# Altium PCB DC_Motor_Breakout.PcbDoc
Units mil, origin at the board's own origin, x right, y up, seen from the top; angles counter-clockwise.
Board outline 1440.01 x 1500 mil, 2 copper layers (Top Layer, Bottom Layer), stack 59.8 mil thick; 3 components, 2 nets, 19 pads, 204 vias.
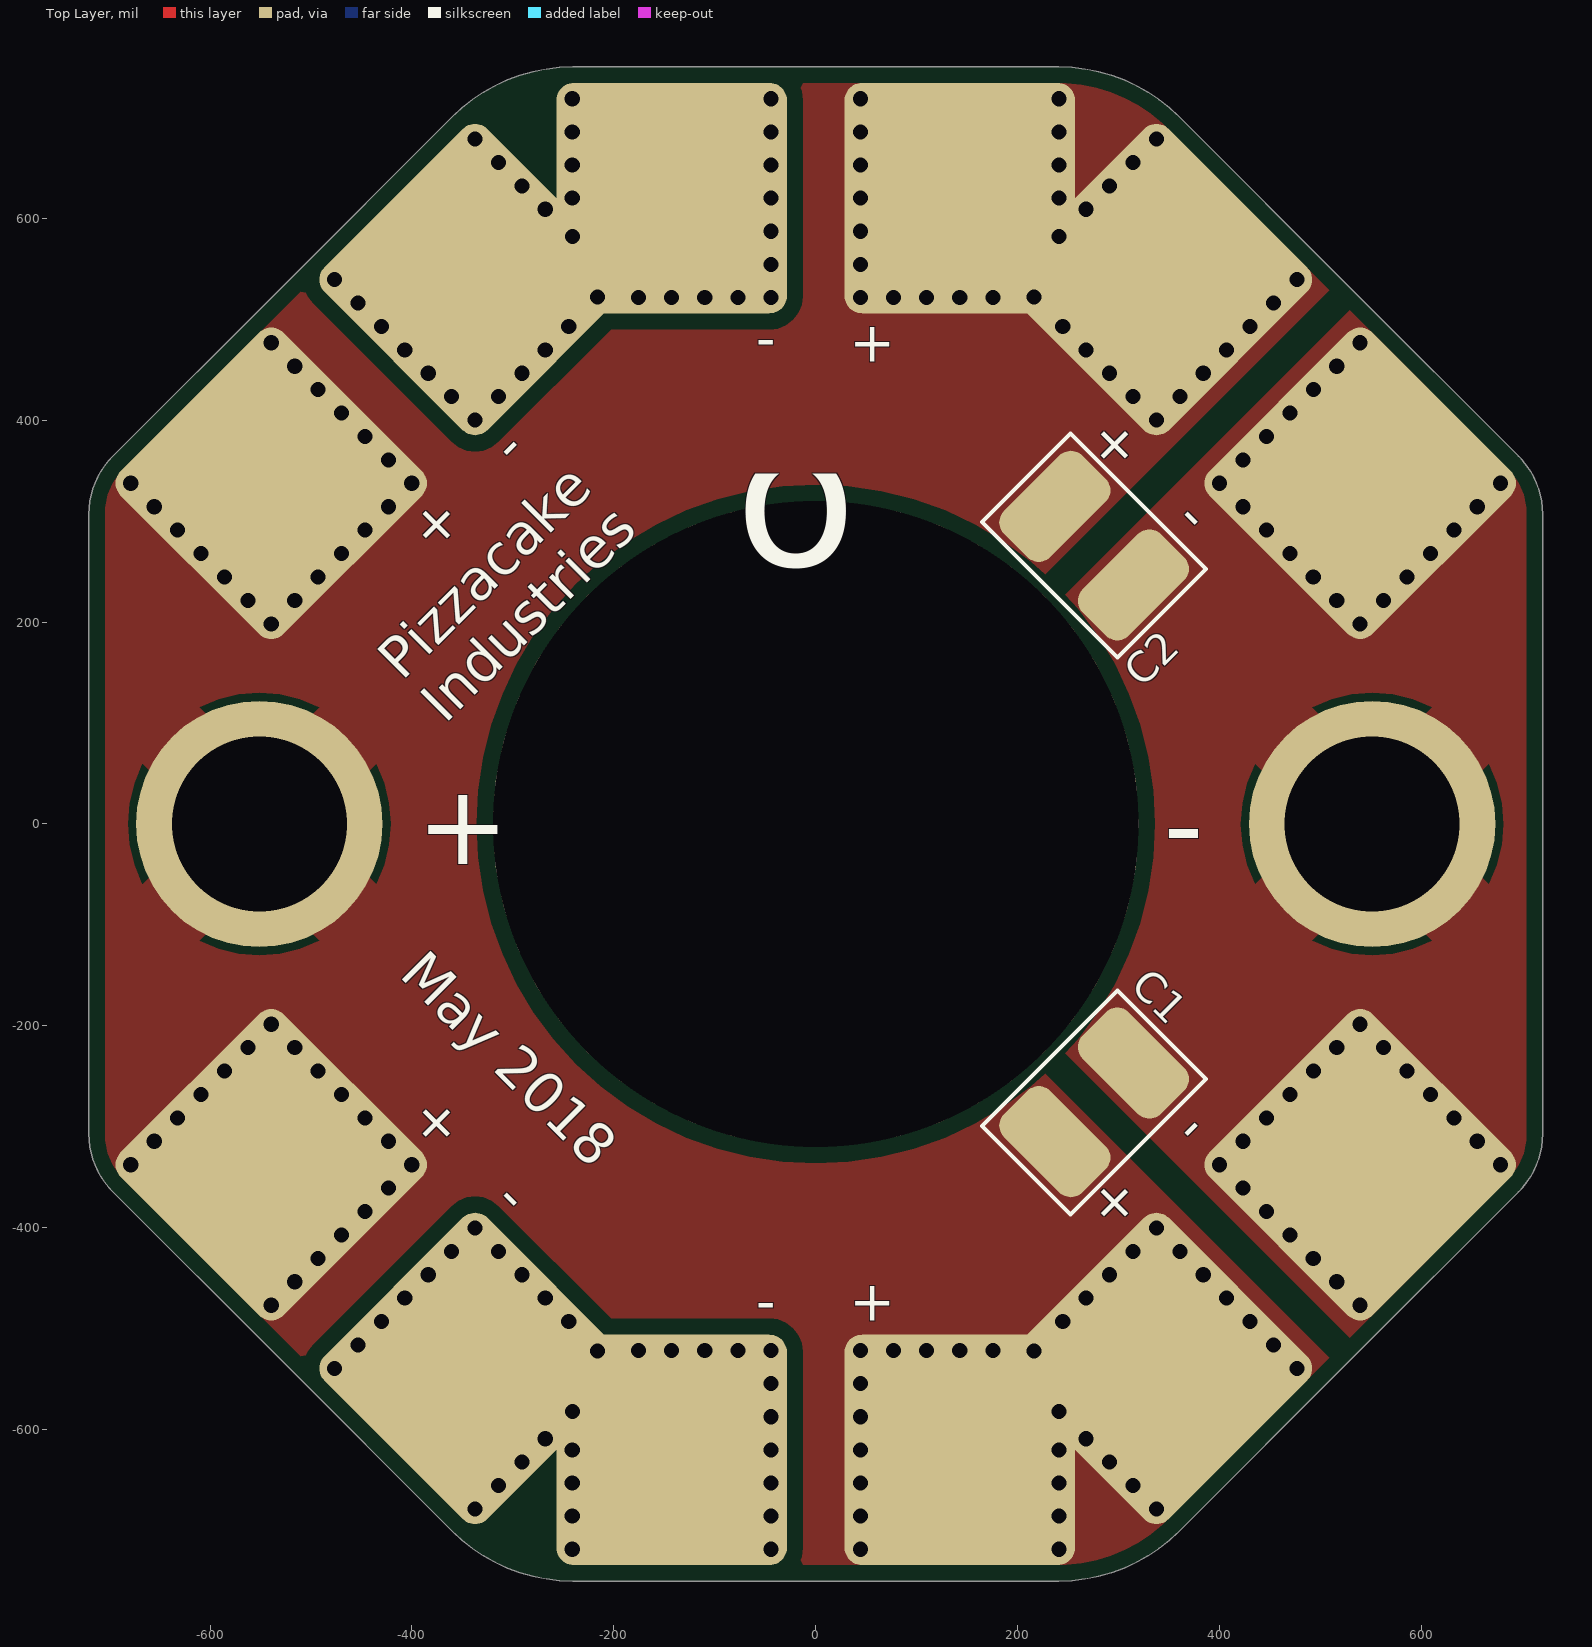
[diagram p0: Top Layer view]
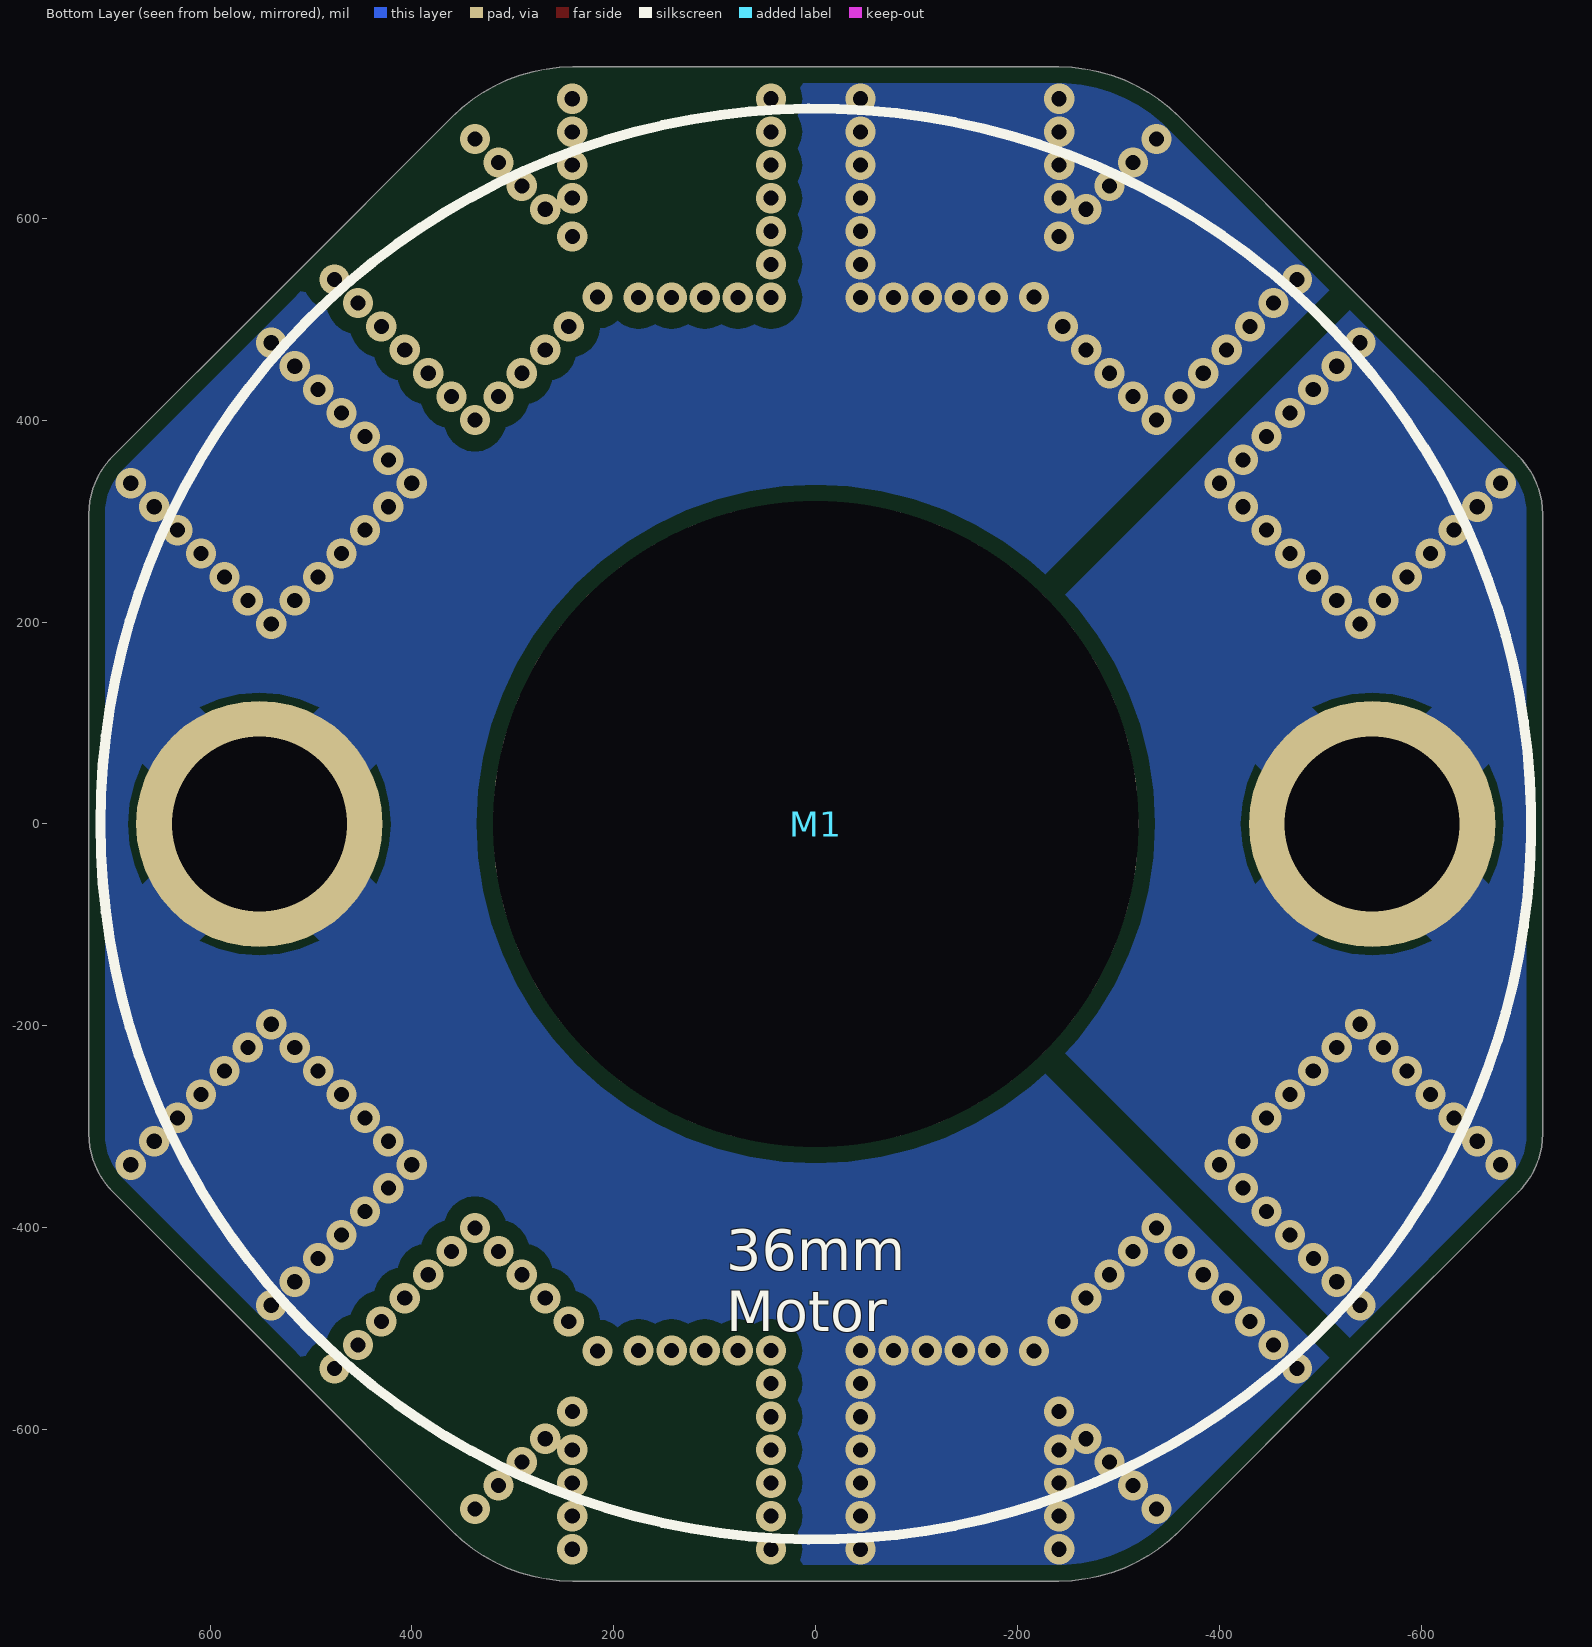
[diagram p1: Bottom Layer view, seen from below]

## Layer stack, top to bottom
Top Solder: solder mask 0.4, Solder Resist, Dk 3.5
Top Layer: signal copper 1.4
Dielectric 1: dielectric 57, FR-4, Dk 4.8
Bottom Layer: signal copper 1.4
Bottom Solder: solder mask 0.4, Solder Resist, Dk 3.5

## Board outline
-696.19,-364.47 -530.33,-530.33 -360.23,-700.43 ccw(c-240.56,-580.77) -240.56,-750 240.56,-750 ccw(c240.56,-580.77) 360.23,-700.43 360.22,-700.43 530.33,-530.32 696.18,-364.48 ccw(c638.67,-306.97) 720,-306.97 720,306.96 ccw(c638.67,306.96) 696.18,364.47 696.19,364.47 530.33,530.33 360.23,700.43 ccw(c240.56,580.77) 240.56,750 -240.56,750 ccw(c-240.56,580.77) -360.23,700.43 -360.22,700.43 -530.33,530.32 -696.18,364.47 ccw(c-638.67,306.96) -720,306.96 -720,-306.96 ccw(c-638.67,-306.96)

## Design rules (kind name [scope] priority, off if disabled: settings)
BoardOutlineClearance [All] p1: gap=0 ignorepadtopadclearanceinfootprint=FALSE except(16: Poly-OutlineEdge)
Clearance Clearance_HV [InNetClass('HV') vs NOT ((OnLayer('Top Overlay') OR OnLayer('Bottom Overlay')))] p1: gap=50 ignorepadtopadclearanceinfootprint=FALSE except(0: Arc-Hole Track-Hole SMDPad-Hole THPad-Hole Via-Hole Fill-Hole Poly-Hole Region-Hole Text-Hole; 40: THPad-THPad)
Clearance Clearance_MV [InNetClass('MV') vs NOT ((OnLayer('Top Overlay') OR OnLayer('Bottom Overlay')))] p2: gap=20 ignorepadtopadclearanceinfootprint=FALSE except(0: Arc-Hole Track-Hole SMDPad-Hole THPad-Hole Via-Hole Fill-Hole Poly-Hole Region-Hole Text-Hole)
Clearance "Polygon Clearance" [InPoly] p3: gap=16 ignorepadtopadclearanceinfootprint=FALSE except(0: Arc-Hole Track-Hole SMDPad-Hole THPad-Hole Via-Hole Fill-Hole Poly-Hole Region-Hole Text-Hole)
Clearance [NOT ((OnLayer('Top Overlay') OR OnLayer('Bottom Overlay')))] p4: gap=7.5 ignorepadtopadclearanceinfootprint=FALSE except(0: Arc-Hole Track-Hole SMDPad-Hole THPad-Hole Via-Hole Fill-Hole Poly-Hole Region-Hole Text-Hole)
ComponentClearance ComponentClearance_Connectors [Name Like 'J*' vs Name Like 'J*'] p1: gap=0 collisioncheckmode=3 verticalgap=0 showdistances=FALSE
ComponentClearance [All] p2: gap=10 collisioncheckmode=3 verticalgap=0 showdistances=FALSE
DiffPairsRouting [All] p1: maxlimit=12 minlimit=7.5 mostfreqgap=7.5 toplayer_minwidth=6 toplayer_maxwidth=12 toplayer_prefwidth=10 bottomlayer_minwidth=6 bottomlayer_maxwidth=12 bottomlayer_prefwidth=10 maxuncoupledlength=500
Height [All] p1: minheight=0 maxheight=39370.08 prefheight=500
HoleSize [All] p1: absolutevalues=TRUE maxlimit=250 minlimit=15 maxpercent=80.000 minpercent=20.000
MinimumSolderMaskSliver [All] p1 off: minsoldermaskwidth=4
PlaneClearance PlaneClearance_HV [InNetClass('HV')] p1: clearance=50
PlaneClearance PlaneClearance_MV [InNetClass('MV')] p2: clearance=30
PlaneClearance [All] p3: clearance=20
PlaneConnect [All] p1: planeconnectstyle=Relief reliefexpansion=10 reliefentries=4 reliefconductorwidth=12 reliefairgap=6
PolygonConnect [All] p1: thpad.connectstyle=Relief thpad.reliefconductorwidth=80 thpad.reliefentries=4 thpad.polygonreliefangle="45 Angle" thpad.airgapwidth=7.5 smdpad.connectstyle=Direct smdpad.reliefconductorwidth=12 smdpad.reliefentries=4 smdpad.polygonreliefangle="90 Angle" smdpad.airgapwidth=7.5 via.connectstyle=Direct via.reliefconductorwidth=12 via.reliefentries=4 via.polygonreliefangle="90 Angle" via.airgapwidth=7.5
RoutingVias [All] p1: holewidth=15 width=30 viastyle="Through Hole" minholewidth=15 minwidth=20 maxholewidth=250 maxwidth=500
SMDNeckDown [All] p1: percent=100.000
SilkToSilkClearance [All] p1 off: silktosilkclearance=10
SilkToSolderMaskClearance [IsPad] p1: minsilkscreentomaskgap=6 clearancetoexposedcopper=TRUE
SolderMaskExpansion [All] p1: expansion=4
ViasUnderSMD [All] p1: allowed=FALSE
Width [All] p1: maxlimit=1000 minlimit=6 preferedwidth=10 minimp=50.000000 maximp=50.000000 favimp=50.000000 checkconnectedcopper=TRUE
21 further rules are at their usual default settings.

## Components (designator, comment, footprint, x,y, rotation, side; value= is the part's Value field where it differs from the comment)
C1 "C_1210_10uF" 1210_Capacitor 275.77,-275.77 r225 top value=10uF
C2 "C_1210_10uF" 1210_Capacitor 275.77,275.77 r135 top value=10uF
M1 "DC Motor" Motor_DC_36mm 0,0 r0 bottom locked

## Footprints (in the part's own frame and the unit in brackets; to place one, negate y for a bottom-side part, rotate by r counter-clockwise, add the part's x,y. Pads: shape width x height; smd on the part's side, far side on the other; paste and mask are expansions set on the pad)
1210_Capacitor [mil] "1210 Capacitor"
  rrect50% 65x110 smd: 1(-55,0) 2(55,0)
  silkscreen extent -95,-62 95,62, body extent -84,-54 82,52, height 36
Motor_DC_36mm [mm] "36 mm diameter brushed DC gear motor"
  round 6.2 hole 4.4: 1(-14,0) 2(14,0)
  round 16.25 hole 16.25 unplated: ""(0,0)
  silkscreen extent -18,-18 18,18, body extent -26.15,-26.15 26.15,26.15, height 98.01

## Part data
C1 C2: "CAP CER 10UF 50V 10% X5R 1210", Manufacturer="Taiyo Yuden", Manufacturer PN=UMK325BJ106KM-T, Package=1210, Supplier Part Number 1=587-2247-1-ND, Supplier 1=Digi-Key, SVP Creator="Matt Rogge"
M1: library part M_DC_Motor, "36mm DC Motor"

## Free pads (board coordinates)
  rrect15% 228.35x228.35 smd rot 135: 1(-539.33,-337.5) 1(539.33,337.49) 2(-337.49,-539.32) 2(337.49,539.32)
  rrect15% 228.35x228.35 smd rot 45: 1(-337.5,539.32) 1(337.5,-539.33) 2(-539.32,337.48) 2(539.32,-337.49)
  rrect15% 228.35x228.35 smd: 1(-142.72,-620.01) 1(142.72,620.01) 2(-142.72,619.99) 2(142.72,-620)

## Via types
v1: diameter 30, hole 15, Top Layer to Bottom Layer, tented bottom, 204 vias

## Nets (pads, with @x,y where several pads share a name; then routed paths per layer and width w, separated by ;. In a path a pad name is that pad's centre, name@x,y a point inside that pad or via, vN(x,y) a via of type N, cw(c..) or ccw(c..) an arc to the next point about the centre after c; other vN are vias at no path point)
MOTOR+: C1.2 C2.2 M1.1 pad.1@142.72,620.01 pad.1@337.5,-539.33 pad.1@-539.33,-337.5 pad.2@142.72,-620 pad.2@337.49,539.32 pad.2@-539.32,337.48
  other v1: 44.29,-718.43 241.14,-718.43 44.28,-685.63 241.15,-685.63 337.49,-678.52 314.29,-655.34 44.28,-652.82 241.15,-652.82 291.09,-632.14 44.29,-620.01 241.14,-620.01 267.9,-608.93 44.28,-587.2 241.09,-582.04 44.28,-554.4 476.68,-539.32 44.29,-521.59 77.1,-521.6 109.91,-521.6 142.72,-521.59 175.52,-521.6 216.22,-521.99 453.49,-516.14 244.69,-492.92 430.29,-492.94 -539.32,-476.68 267.9,-469.73 407.1,-469.73 -516.14,-453.49 291.09,-446.53 383.89,-446.54 -492.94,-430.29 314.29,-423.33 360.69,-423.34 -469.73,-407.1 337.5,-400.14 -446.54,-383.89 -423.34,-360.69 -678.52,-337.49 -400.14,-337.5 -655.34,-314.29 -423.33,-314.29 -632.14,-291.09 -446.53,-291.09 -608.93,-267.9 -469.73,-267.9 -585.74,-244.69 -492.92,-244.69 -562.54,-221.5 -516.12,-221.5 -539.33,-198.31 -539.33,198.3 -562.54,221.49 -516.14,221.51 -585.74,244.69 -492.94,244.71 -608.93,267.9 -469.73,267.9 -632.14,291.09 -446.54,291.1 -655.34,314.28 -423.34,314.3 -678.52,337.48 -400.14,337.49 -423.33,360.7 -446.53,383.9 337.5,400.13 -469.73,407.09 314.31,423.34 360.71,423.32 -492.92,430.3 291.11,446.54 383.91,446.52 -516.12,453.5 267.9,469.73 407.1,469.73 -539.32,476.68 244.71,492.94 430.3,492.92 453.5,516.12 44.29,521.58 77.1,521.57 109.91,521.57 142.72,521.58 175.52,521.57 216.22,521.99 476.68,539.32 44.3,554.39 241.09,582.04 44.3,587.2 267.9,608.92 44.29,620.01 241.14,620.01 291.09,632.13 44.3,652.81 241.15,652.81 314.29,655.33 337.49,678.51 44.3,685.62 241.15,685.62 44.29,718.42 241.14,718.42
MOTOR-: C1.1 C2.1 M1.2 pad.1@539.33,337.49 pad.1@-142.72,-620.01 pad.1@-337.5,539.32 pad.2@539.32,-337.49 pad.2@-142.72,619.99 pad.2@-337.49,-539.32
  other v1: -241.14,-718.43 -44.29,-718.43 -241.15,-685.63 -44.3,-685.63 -337.49,-678.52 -314.29,-655.34 -241.15,-652.82 -44.3,-652.82 -291.09,-632.14 -241.14,-620.01 -44.29,-620.01 -267.9,-608.93 -44.3,-587.2 -241.09,-582.04 -44.3,-554.4 -476.68,-539.32 -216.22,-521.99 -175.52,-521.57 -142.72,-521.59 -109.91,-521.57 -77.1,-521.57 -44.29,-521.59 -453.5,-516.12 -430.3,-492.92 -244.71,-492.94 539.32,-476.68 -407.1,-469.73 -267.9,-469.73 516.12,-453.5 -383.91,-446.53 -291.11,-446.54 492.92,-430.3 -360.71,-423.33 -314.31,-423.34 469.73,-407.1 -337.5,-400.14 446.53,-383.91 423.33,-360.71 400.14,-337.5 678.52,-337.49 423.34,-314.31 655.34,-314.29 446.54,-291.11 632.14,-291.09 469.73,-267.9 608.93,-267.9 492.94,-244.71 585.74,-244.69 516.14,-221.51 562.54,-221.5 539.33,-198.31 539.33,198.3 516.12,221.49 562.54,221.49 492.92,244.69 585.74,244.69 469.73,267.9 608.93,267.9 446.53,291.09 632.14,291.09 423.33,314.28 655.34,314.28 400.14,337.49 678.52,337.48 423.34,360.68 446.54,383.88 -337.5,400.13 469.73,407.09 -360.69,423.34 -314.29,423.32 492.94,430.28 -383.89,446.54 -291.09,446.52 516.14,453.48 -407.1,469.73 -267.9,469.73 539.32,476.68 -430.29,492.94 -244.69,492.92 -453.49,516.13 -216.22,521.99 -175.52,521.59 -142.72,521.58 -109.91,521.59 -77.1,521.59 -44.29,521.58 -476.68,539.32 -44.28,554.39 -241.09,582.04 -44.28,587.2 -267.9,608.92 -241.14,620.01 -44.29,620.01 -291.09,632.13 -241.15,652.81 -44.28,652.81 -314.29,655.33 -337.49,678.51 -241.15,685.62 -44.28,685.62 -241.14,718.42 -44.29,718.42
pads on no net: M1.

## Polygon pours and split planes (outlines as drawn)
MOTOR- on Top Layer "Motor- Small" (solid, remove dead copper, pour order 8): 20,-0.01 740,719.99 740,-720.01
MOTOR+ on Top Layer "Motor+" (solid, remove dead copper, pour order 0): -800,800 780,800 -20,0 780,-800 -800,-800
MOTOR+ on Bottom Layer "Motor+ Small" (solid, remove dead copper, pour order 4): -20,0 -740,720 -740,-720
MOTOR- on Bottom Layer "Motor-" (solid, remove dead copper, pour order 2): 799.24,800 -780.01,800 20,0 -780,-800 799.24,-800 800,800

## Silkscreen, mask and mechanical layers (free items; w line width, h text height)
Top Overlay:
  text "-" at -39.37,492.04 h39.37 r180
  text "+" at 78.74,492.04 h39.37 r180
  text "+" at 292.25,403.6 h39.37 r135
  text "-" at -320.09,375.76 h39.37 r225
  text "-" at 375.77,320.08 h39.37 r135
  text "+" at -403.61,292.25 h39.37 r225
  text "o" at -80,180 h400
  text "Pizzacake / Industries" at -367.05,98.35 h40 r45
  text "+" at -395,-40 h80
  text "-" at 345,-40 h80
  text "May 2018" at -413.46,-150.49 h40 r315
  text "+" at -403.61,-292.25 h39.37 r315
  text "-" at 375.77,-320.09 h39.37 r45
  text "-" at -320.09,-375.77 h39.37 r315
  text "+" at 292.25,-403.61 h39.37 r45
  text "-" at -39.37,-492.05 h39.37
  text "+" at 78.74,-492.05 h39.37
Bottom Overlay:
  text "36mm / Motor" at 88.56,-502.25 h40
  text "o" at 775,-1990 h3500
Mechanical 1:
  the board outline again, w10